# Allegro board ATMEGA328.brd
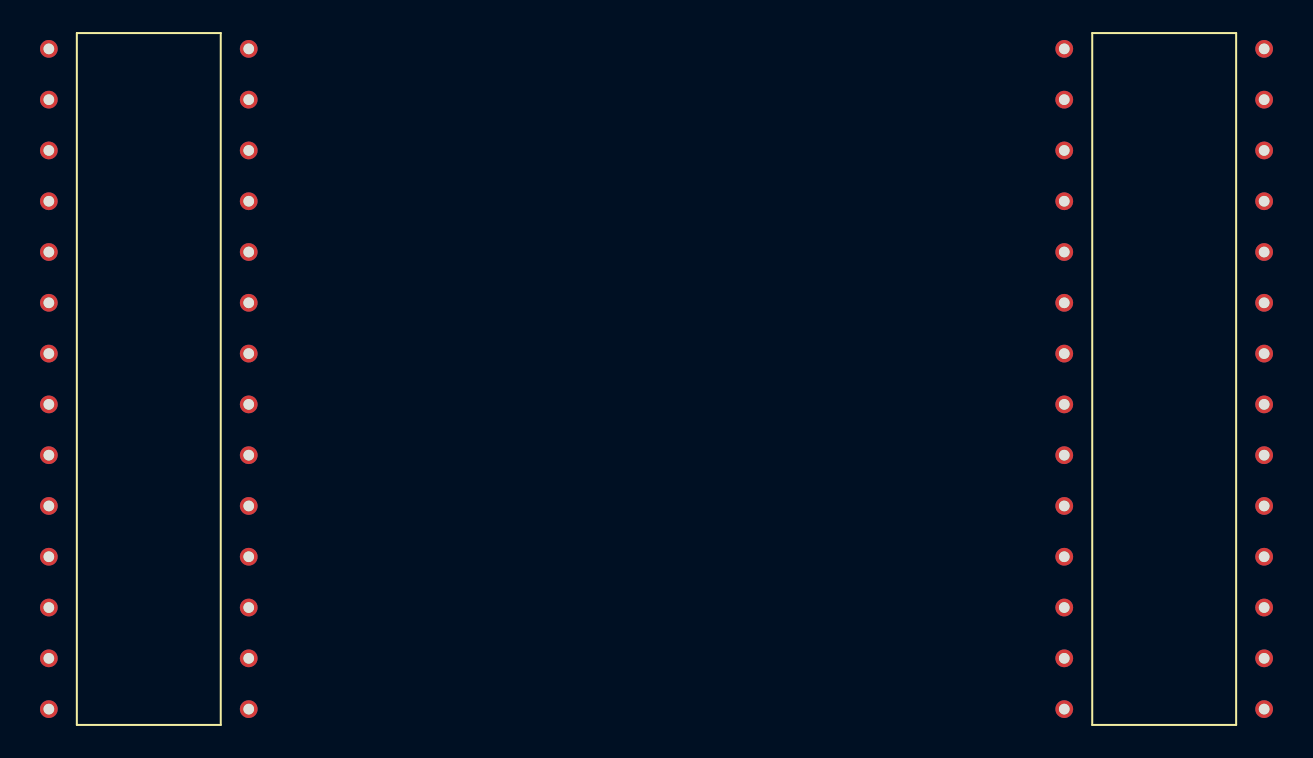
[diagram p0: board, top side]
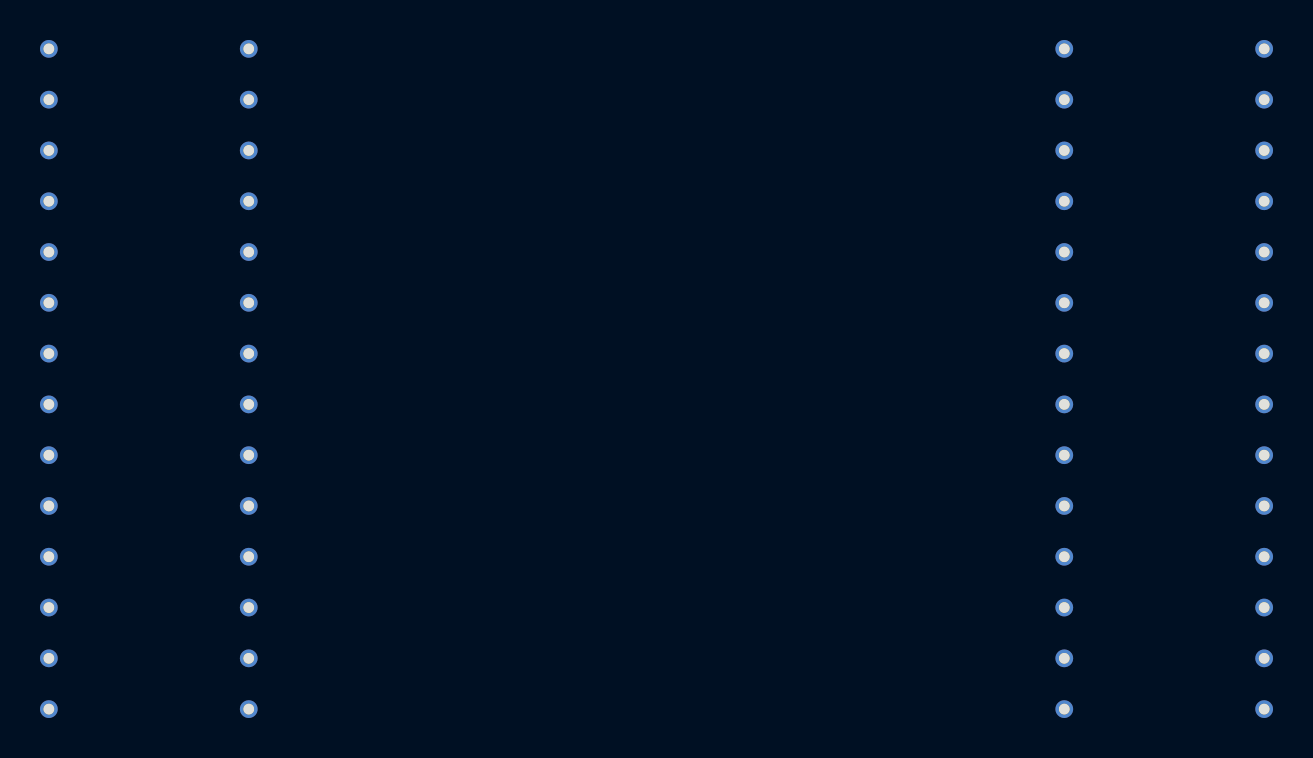
[diagram p1: board, bottom side, seen from below]

No outline. copper layers: TOP, BOTTOM. Coordinates in mm from the lowest, leftmost part position.

## Placement (name value [footprint] x y rotation side)
IC2  ATmega16U2-MU<R>  [MY_ATMEGA328_DIP]  50.8 0 0 top
IC3  ATmega16U2-MU<R>  [MY_ATMEGA328_DIP]  0 0 0 top

## Library data of the parts
IC2 IC3 = ATMega8-TQFP32_1

## Footprints (pads in the part's own frame, mm; a bottom-side part is the same pattern mirrored in y, then rotated)
MY_ATMEGA328_DIP
  round 0.889 hole 0.533: 1(-5,16.51) 2(-5,13.97) 3(-5,11.43) 4(-5,8.89) 5(-5,6.35) 6(-5,3.81) 7(-5,1.27) 8(-5,-1.27) 9(-5,-3.81) 10(-5,-6.35) 11(-5,-8.89) 12(-5,-11.43) 13(-5,-13.97) 14(-5,-16.51) 15(5,-16.51) 16(5,-13.97) 17(5,-11.43) 18(5,-8.89) 19(5,-6.35) 20(5,-3.81) 21(5,-1.27) 22(5,1.27) 23(5,3.81) 24(5,6.35) 25(5,8.89) 26(5,11.43) 27(5,13.97) 28(5,16.51)

## Nets
N01862: IC2.22(AGND) IC3.22(AGND)
N01864: IC2.8(GND) IC3.8(GND)
N01866: IC2.1(RESET(PC1/DW)) IC3.1(RESET(PC1/DW))
N01868: IC2.10(XTAL2) IC3.10(XTAL2)
N01870: IC2.9(XTAL1) IC3.9(XTAL1)
N01872: IC2.21(AREF) IC3.21(AREF)
N01874: IC2.20(AVCC) IC3.20(AVCC)
N01876: IC2.7(VCC) IC3.7(VCC)

Pads without a net: IC2 2 3 4 5 6 11 12 13 14 15 16 17 18 19 23 24 25 26 27 28; IC3 2 3 4 5 6 11 12 13 14 15 16 17 18 19 23 24 25 26 27 28
